# EAGLE board weather-cube_sensor_coupon_sht31d (EAGLE 7.3.0)
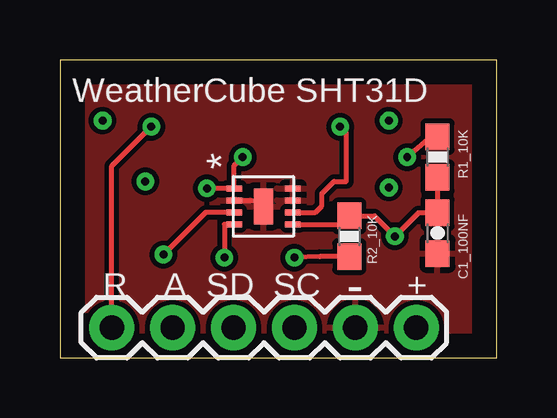
[diagram p0: board, top side]
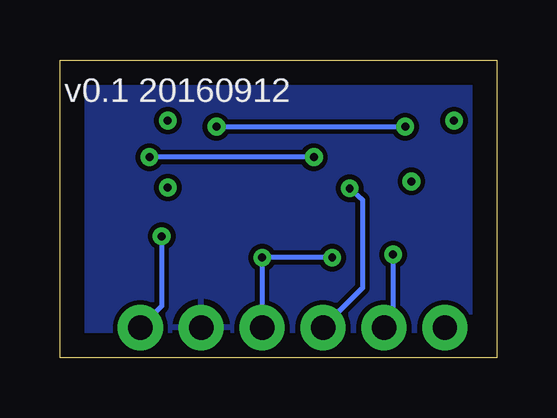
[diagram p1: board, bottom side, seen from below]

Size 18.21 x 12.44 mm. Coordinates in mm from the lower left corner, seen from the top.
Outline: 0,0 18.21,0 18.21,12.44 0,12.44 0,0
Copper layers (1*16): Top 0.035mm / dielectric 1.5mm / Bottom 0.035mm
Design rules "default *": minimum track width 10mil, minimum drill 24mil, track to track 8mil, track to pad 8mil, pad to pad 8mil, via to via 8mil, smd to smd 8mil, copper to edge 40mil, drill to drill 8mil, minimum pad ring 10mil, minimum via ring 8mil, stop-mask expansion 4mil, vias tented up to drill 14mil, thermal gap 10mil

## Footprints (pad centres in the part's own frame; a part is rotated, then mirrored left to right if it is on the bottom)
0603-CAP = smd 1.1 x 1: 1 -0.85,0; 2 0.85,0
1X06 = drill 1.016 pad 1.88: 1 0,0; 2 2.54,0; 3 5.08,0; 4 7.62,0; 5 10.16,0; 6 12.7,0
0603-RES = smd 1.1 x 1: 1 -0.85,0; 2 0.85,0
SHT31-D = smd 0.65 x 0.25: P$1 0.025,2; P$2 0.025,1.5; P$3 0.025,1; P$4 0.025,0.5; P$5 2.475,0.5; P$6 2.475,1; P$7 2.475,1.5; P$8 2.475,2 | smd 0.8 x 1.5: P$9 1.25,1.25

## Placement (x,y rotation side)
C1_100NF  [0603-CAP]  15.75,5.21 90 top
JP1  [1X06]  14.86,1.27 180 top
R1_10K  [0603-RES]  15.75,8.38 270 top
R2_10K  [0603-RES]  12.07,5.08 270 top
U$1  SHT31-D  [SHT31-D]  7.24,5.08 0 top

## Library data of the parts
C1_100NF R1_10K R2_10K = SparkFun-Passives
JP1 = SparkFun-Connectors; PROD_ID: CONN-08437
U$1 = awqua_eagle_library

## Nets
ALERT: JP1.5 U$1.P$3
GND: C1_100NF.1 JP1.2 U$1.P$2 U$1.P$7 U$1.P$8 U$1.P$9
RESET: JP1.6 U$1.P$6
SCL: JP1.3 R2_10K.2 U$1.P$4
SDA: JP1.4 R1_10K.1 U$1.P$1
VCC: C1_100NF.2 JP1.1 R1_10K.2 R2_10K.1 U$1.P$5

## Tracks (layer width: path | path; a pad name or v marks a point on that pad's centre or on a via)
ALERT  (via drill 0.33)
  Top 0.203: U$1.P$3 6.08,6.08 v4.32,4.32
  Bottom 0.203: v4.32,4.32 4.32,1.65 JP1.5
GND
  Top 0.203: U$1.P$2 8.24,6.58 U$1.P$9
  pour Top: -3.56,13.34 22.48,13.34 22.48,-3.81 -3.56,-3.81
  pour Bottom: -4.06,12.83 21.97,12.83 21.97,-4.32 -4.06,-4.32
N$1  (via drill 0.33)
  other vias: 3.56,7.37
N$2  (via drill 0.33)
  other vias: 1.78,9.91
N$3  (via drill 0.33)
  other vias: 13.72,9.91
N$4  (via drill 0.33)
  other vias: 13.72,7.11
RESET  (via drill 0.33)
  Top 0.203: U$1.P$6 10.65,6.08 10.92,6.35 10.92,6.86 11.43,7.37 11.94,7.37 11.94,9.4 v11.68,9.65 | JP1.6 2.16,8 v3.81,9.65
  Bottom 0.203: v11.68,9.65 v3.81,9.65
SCL  (via drill 0.33)
  Top 0.203: R2_10K.2 10.83,4.23 v9.78,4.19 | 7.37,5.58 U$1.P$4 6.86,5.58 v6.86,4.19
  Bottom 0.203: JP1.3 v9.78,4.19 v6.86,4.19
SDA  (via drill 0.33)
  Top 0.203: v6.13,7.08 U$1.P$1 7.26,8.03 v7.62,8.38 | v14.48,8.38 15.66,9.4 R1_10K.1
  Bottom 0.203: v6.13,7.08 5.59,6.6 5.59,2.92 JP1.4 | v7.62,8.38 v14.48,8.38
VCC  (via drill 0.33)
  Top 0.203: R1_10K.2 C1_100NF.2 14.95,6.06 v13.97,5.08 13.12,5.93 R2_10K.1 11.71,5.58 U$1.P$5
  Bottom 0.203: v13.97,5.08 13.97,2.16 JP1.1

## Text on the board
tPlace: WeatherCube SHT31D | * | R | A | SD | SC | + | -
bPlace: v0.1 20160912